# EAGLE board Main-v3.0 (EAGLE 8.3.0)
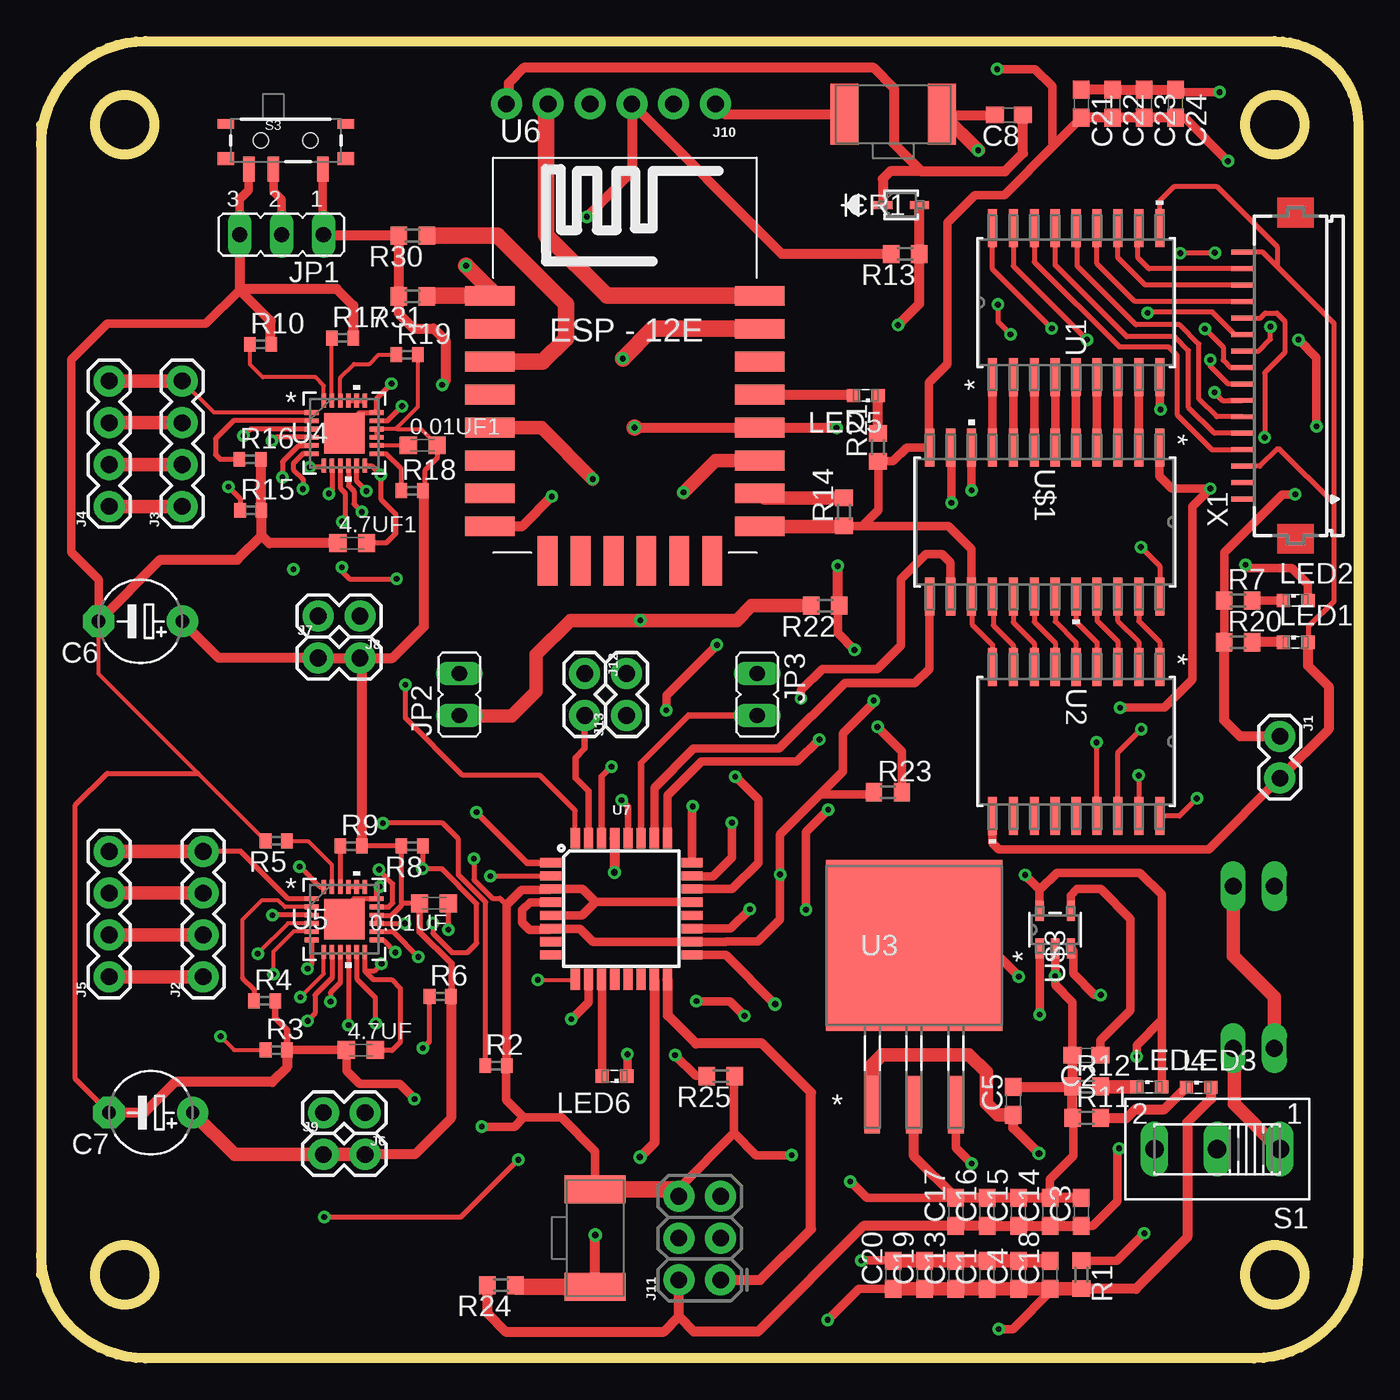
[diagram p0: board, top side]
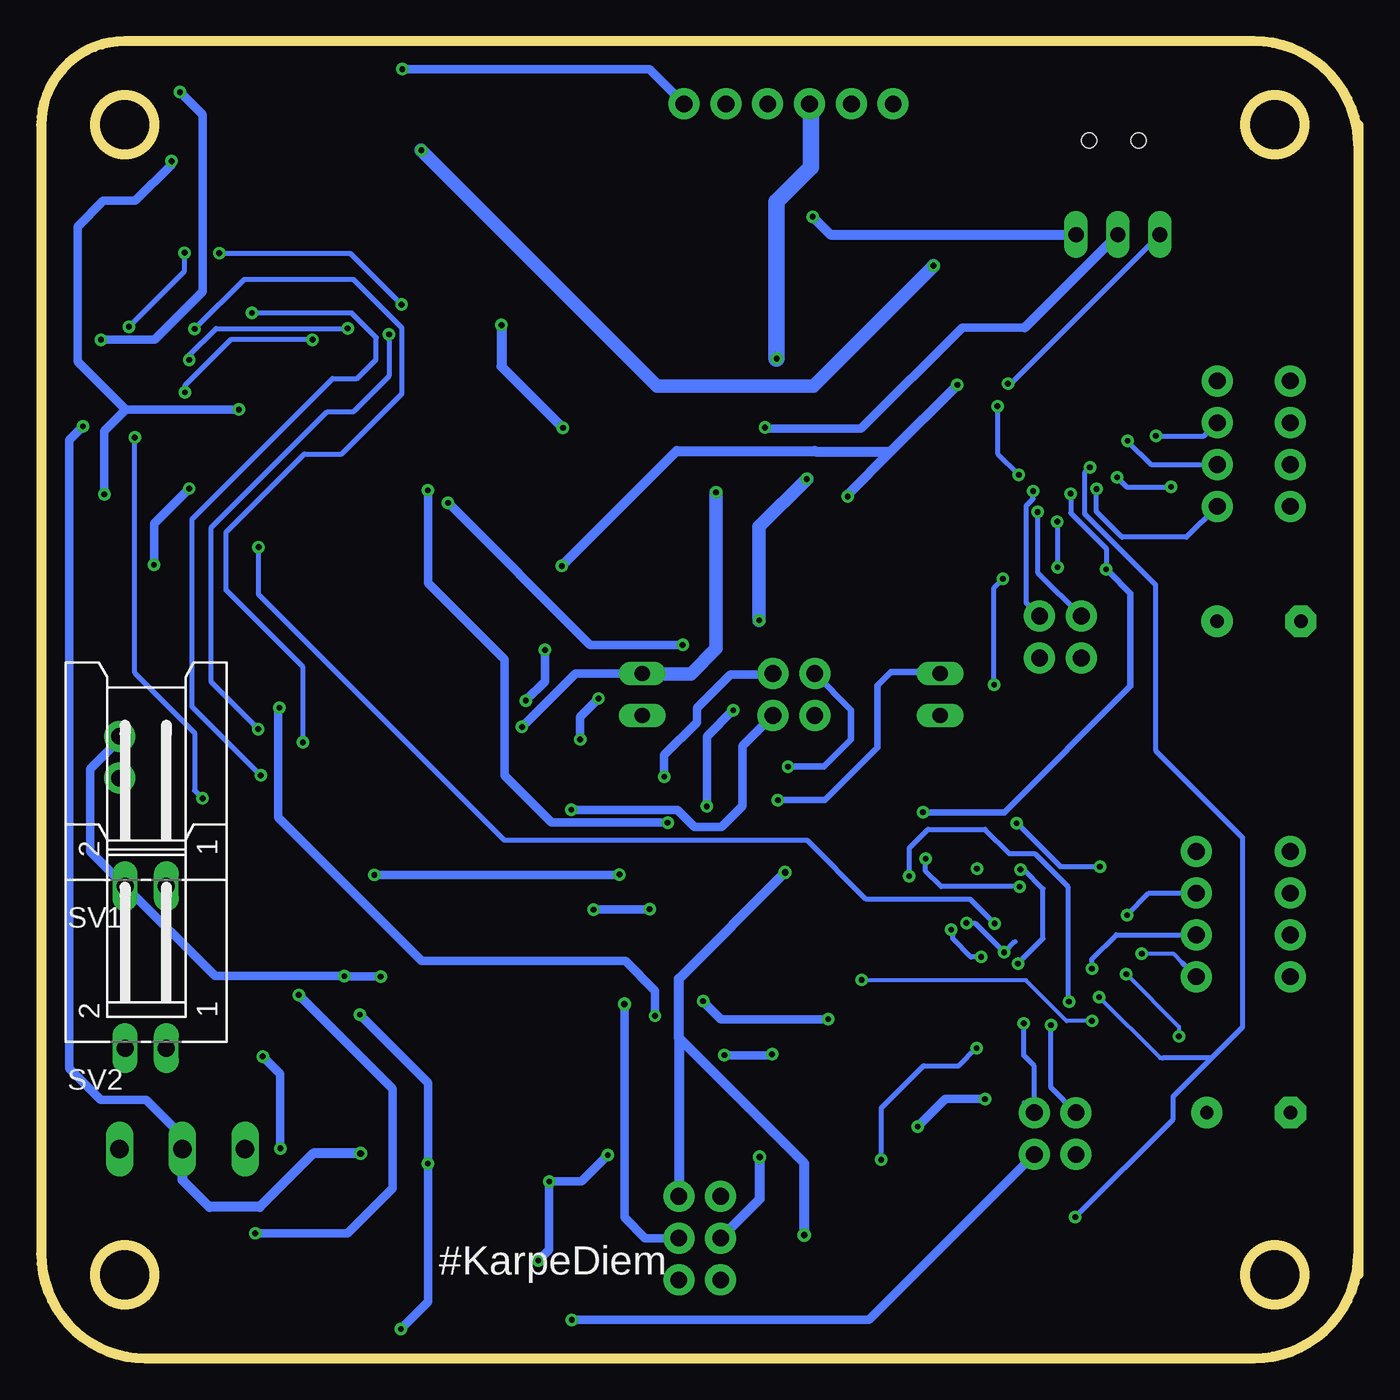
[diagram p1: board, bottom side, seen from below]

Size 80.01 x 80.01 mm. Coordinates in mm from the lower left corner, seen from the top.
Outline: 0,73.66 0,6.35
Outline: 0,6.35 0,5.08
Outline: 0,74.93 0,73.66
Outline: 0,73.66 arc-90 6.35,80.01 74.93,80.01 arc-90 80.01,74.93 80.01,6.35 arc-90 73.66,0 6.35,0 arc-90 0,6.35
Outline: circle at 74.93,74.93 radius 1.8
Outline: circle at 5.08,74.93 radius 1.8
Outline: circle at 5.08,5.08 radius 1.8
Outline: circle at 74.93,5.08 radius 1.8
Copper layers (1*16): Top 0.035mm / dielectric 1.5mm / Bottom 0.035mm
Design rules "default": minimum track width 6mil, minimum drill 0.35mm, track to track 6mil, track to pad 6mil, pad to pad 6mil, via to via 6mil, smd to smd 6mil, copper to edge 40mil, drill to drill 6mil, minimum pad ring 10mil, minimum via ring 8mil, stop-mask expansion 4mil, vias tented up to drill 0mil, thermal gap 10mil

## Footprints (pad centres in the part's own frame; a part is rotated, then mirrored left to right if it is on the bottom)
C0603K = smd 1.05 x 1.08: 1 -0.875,0; 2 0.875,0
C0603 = smd 1.1 x 1: 1 -0.85,0; 2 0.85,0
E5-5 = drill 0.813 pad 1.905: + -2.54,0 | drill 0.813 pad 1.905 octagon: - 2.54,0
SOD-323 = smd 1.168 x 0.483: 1 -1.118,0; 2 1.118,0
1X02 = drill 1.016 pad 1.88: 1 0,0; 2 2.54,0
1X04 = drill 1.016 pad 1.88: 1 0,0; 2 2.54,0; 3 5.08,0; 4 7.62,0
1X06_NO_SILK = drill 1.016 pad 1.88: 1 0,0; 2 2.54,0; 3 5.08,0; 4 7.62,0; 5 10.16,0; 6 12.7,0
2X3-NS = drill 1.016 pad 1.88: 1 -2.54,-1.27; 2 -2.54,1.27; 3 0,-1.27; 4 0,1.27; 5 2.54,-1.27; 6 2.54,1.27
JP2 = drill 0.914 long: 1 -2.54,0; 2 0,0; 3 2.54,0
JP1 = drill 0.914 long: 1 0,-1.27; 2 0,1.27
SML0603 = smd 0.8 x 0.8: A 0.75,0; C -0.75,0
R0603 = smd 1 x 1.1: 1 -0.85,0; 2 0.85,0
R0402 = smd 0.7 x 0.9: 1 -0.65,0; 2 0.65,0
255SB = drill 1.118 long: 1 -3.81,0; 2 0,0; 3 3.81,0
KSS = smd 1.7 x 3.7: P$1 -2.95,0; P$2 2.95,0
SWITCH-SPST-SMD-A = smd 0.7 x 1.5: 1 -2.25,-1.75; 2 -0.75,-1.75; 3 2.25,-1.75 | smd 1 x 0.6: GND1 -3.65,1; GND3 3.65,1 | smd 1 x 0.8: GND2 -3.65,-1.1; GND4 3.65,-1.1 | hole 0.9: -1.5,0; 1.5,0
L02P = drill 1.016 long: 1 1.25,-6.25; 2 -1.25,-6.25
DW18 = smd 2.311 x 0.559: 1 -4.521,5.08; 2 -4.521,3.81; 3 -4.521,2.54; 4 -4.521,1.27; 5 -4.521,0; 6 -4.521,-1.27; 7 -4.521,-2.54; 8 -4.521,-3.81; 9 -4.521,-5.08; 10 4.521,-5.08; 11 4.521,-3.81; 12 4.521,-2.54; 13 4.521,-1.27; 14 4.521,0; 15 4.521,1.27; 16 4.521,2.54; 17 4.521,3.81; 18 4.521,5.08
KTT3_6P22X6P6 = smd 0.965 x 3.505: 1 -2.54,-9.677; 2 0,-9.677; 3 2.54,-9.677 | smd 10.719 x 10.363: 4 0,0
RGE24_2P45X2P45 = smd 0.85 x 0.28: 1 -1.975,1.25; 2 -1.975,0.75; 3 -1.975,0.25; 4 -1.975,-0.25; 5 -1.975,-0.75; 6 -1.975,-1.25; 13 1.975,-1.25; 14 1.975,-0.75; 15 1.975,-0.25; 16 1.975,0.25; 17 1.975,0.75; 18 1.975,1.25 | smd 0.28 x 0.85: 7 -1.25,-1.975; 8 -0.75,-1.975; 9 -0.25,-1.975; 10 0.25,-1.975; 11 0.75,-1.975; 12 1.25,-1.975; 19 1.25,1.975; 20 0.75,1.975; 21 0.25,1.975; 22 -0.25,1.975; 23 -0.75,1.975; 24 -1.25,1.975 | smd 2.45 x 2.45: 25 0,0
ESP12E-SMD = smd 3 x 1.2: ADC -8.3,3.8; CH_PD -8.3,1.8; GND 8.1,-8.2; GPIO0 8.1,-2.2; GPIO2 8.1,-4.2; GPIO4 8.1,-0.2; GPIO5 8.1,1.8; GPIO12 -8.3,-4.2; GPIO13 -8.3,-6.2; GPIO14 -8.3,-2.2; GPIO15 8.1,-6.2; GPIO16 -8.3,-0.2; RESET -8.3,5.8; RXD0 8.1,3.8; TXD0 8.1,5.8; VCC -8.3,-8.2 | smd 1.2 x 3: CS0 -4.8,-10.3; GPIO9 -0.8,-10.3; GPIO10 1.2,-10.3; MISO -2.8,-10.3; MOSI 3.2,-10.3; SCLK 5.2,-10.3
TQFP32-08 = smd 1.27 x 0.559: 1 -4.293,2.8; 2 -4.293,2; 3 -4.293,1.2; 4 -4.293,0.4; 5 -4.293,-0.4; 6 -4.293,-1.2; 7 -4.293,-2; 8 -4.293,-2.8; 17 4.293,-2.8; 18 4.293,-2; 19 4.293,-1.2; 20 4.293,-0.4; 21 4.293,0.4; 22 4.293,1.2; 23 4.293,2; 24 4.293,2.8 | smd 0.559 x 1.27: 9 -2.8,-4.293; 10 -2,-4.293; 11 -1.2,-4.293; 12 -0.4,-4.293; 13 0.4,-4.293; 14 1.2,-4.293; 15 2,-4.293; 16 2.8,-4.293; 25 2.8,4.293; 26 2,4.293; 27 1.2,4.293; 28 0.4,4.293; 29 -0.4,4.293; 30 -1.2,4.293; 31 -2,4.293; 32 -2.8,4.293
DW24 = smd 2.311 x 0.559: 1 -4.521,6.985; 2 -4.521,5.715; 3 -4.521,4.445; 4 -4.521,3.175; 5 -4.521,1.905; 6 -4.521,0.635; 7 -4.521,-0.635; 8 -4.521,-1.905; 9 -4.521,-3.175; 10 -4.521,-4.445; 11 -4.521,-5.715; 12 -4.521,-6.985; 13 4.521,-6.985; 14 4.521,-5.715; 15 4.521,-4.445; 16 4.521,-3.175; 17 4.521,-1.905; 18 4.521,-0.635; 19 4.521,0.635; 20 4.521,1.905; 21 4.521,3.175; 22 4.521,4.445; 23 4.521,5.715; 24 4.521,6.985
TSOT-23_S5 = smd 1.219 x 0.508: 1 -1.143,0.95; 2 -1.143,0; 3 -1.143,-0.95; 4 1.143,-0.95; 5 1.143,0.95
FH12-16S-1SH = smd 0.3 x 1.3: 1 -7.5,3.25; 2 -6.5,3.25; 3 -5.5,3.25; 4 -4.5,3.25; 5 -3.5,3.25; 6 -2.5,3.25; 7 -1.5,3.25; 8 -0.5,3.25; 9 0.5,3.25; 10 1.5,3.25; 11 2.5,3.25; 12 3.5,3.25; 13 4.5,3.25; 14 5.5,3.25; 15 6.5,3.25; 16 7.5,3.25

## Placement (x,y rotation side)
0.01UF  [C0603K]  23.86,27.64 180 top
0.01UF1  [C0603K]  23.18,55.46 0 top
4.7UF  [C0603K]  19.42,18.73 0 top
4.7UF1  [C0603K]  18.9,49.52 0 top
C1  1uF  [C0603]  57.47,5.08 90 top
C2  0.1uF  [C0603]  63.5,18.41 180 top
C3  1uF  [C0603]  63.18,8.89 90 top
C4  0.1uF  [C0603]  59.37,5.08 90 top
C5  0.33uF  [C0603]  59.05,15.65 90 top
C6  100uF  [E5-5]  6.03,44.77 180 top
C7  100uF  [E5-5]  6.67,14.92 180 top
C8  1uf  [C0603]  58.79,75.53 180 top
C13  0.1uF  [C0603]  55.56,5.08 90 top
C14  0.1uF  [C0603]  61.28,8.89 90 top
C15  0.1uF  [C0603]  59.37,8.89 90 top
C16  0.1uF  [C0603]  57.47,8.89 90 top
C17  0.1uF  [C0603]  55.56,8.89 90 top
C18  0.1uF  [C0603]  61.28,5.08 90 top
C19  0.1uF  [C0603]  53.66,5.08 90 top
C20  0.1uF  [C0603]  51.75,5.08 90 top
C21  0.1uF  [C0603]  63.18,76.2 270 top
C22  0.1uF  [C0603]  65.09,76.2 270 top
C23  0.1uF  [C0603]  66.99,76.2 270 top
C24  0.1uF  [C0603]  68.9,76.2 270 top
CR1  BAT20JFILM  [SOD-323]  52.24,70.05 0 top
J1  [1X02]  75.25,37.78 270 top
J2  [1X04]  9.84,23.18 90 top
J3  [1X04]  8.57,51.75 90 top
J4  [1X04]  4.13,51.75 90 top
J5  [1X04]  4.13,23.18 90 top
J6  [1X02]  19.68,14.92 180 top
J7  [1X02]  16.83,42.55 0 top
J8  [1X02]  19.37,45.09 180 top
J9  [1X02]  17.14,12.38 0 top
J10  [1X06_NO_SILK]  40.96,76.2 180 top
J11  AVR_SPI_PROG_3X2NS  [2X3-NS]  40.01,7.3 90 top
J12  [1X02]  33.02,41.59 270 top
J13  [1X02]  35.56,39.05 90 top
JP1  [JP2]  14.61,68.26 180 top
JP2  [JP1]  25.4,40.32 0 top
JP3  [JP1]  43.5,40.32 180 top
LED1  [SML0603]  76.2,43.5 0 top
LED2  [SML0603]  76.2,46.04 0 top
LED3  [SML0603]  70.31,16.46 0 top
LED4  [SML0603]  67.31,16.48 0 top
LED5  [SML0603]  50.09,58.48 180 top
LED6  [SML0603]  34.82,17.14 180 top
R1  100K  [R0603]  63.18,5.08 270 top
R2  47k  [R0402]  27.62,17.78 0 top
R3  0.1R  [R0402]  14.29,18.73 0 top
R4  0.1R  [R0402]  13.58,21.72 0 top
R5  47k  [R0402]  14.29,31.43 180 top
R6  10k  [R0402]  24.24,21.98 0 top
R7  330R  [R0603]  72.71,46.04 0 top
R8  1.5k  [R0402]  22.54,31.11 180 top
R9  10k  [R0402]  18.83,31.11 0 top
R10  47k  [R0402]  13.34,61.59 0 top
R11  330R  [R0603]  63.5,14.61 0 top
R12  150R  [R0603]  63.5,16.51 0 top
R13  10k  [R0603]  52.48,67.08 180 top
R14  10k  [R0603]  48.77,51.41 90 top
R15  0.1R  [R0402]  12.74,51.51 0 top
R16  0.1R  [R0402]  12.7,54.61 0 top
R17  47k  [R0402]  18.3,61.98 0 top
R18  1.5k  [R0402]  22.54,52.7 0 top
R19  10k  [R0402]  22.23,60.96 0 top
R20  150R  [R0603]  72.71,43.5 0 top
R21  100R  [R0603]  50.83,55.35 90 top
R22  2.2k  [R0603]  47.62,45.72 180 top
R23  2.2k  [R0603]  51.44,34.39 0 top
R24  10k  [R0603]  27.94,4.45 180 top
R25  100R  [R0603]  41.27,17.14 180 top
R30  10k  [R0603]  22.57,68.2 180 top
R31  10k  [R0603]  22.57,64.5 180 top
S1  [255SB]  71.44,12.7 180 top
S2  KSS  [KSS]  51.75,75.56 0 top
S3  [SWITCH-SPST-SMD-A]  14.86,73.98 0 top
S4  KSS  [KSS]  33.66,7.3 270 top
SV1  [L02P]  73.66,34.92 0 bottom
SV2  [L02P]  73.66,25.08 0 bottom
U1  ULN2803ADWG4  [DW18]  62.87,64.14 90 top
U2  ULN2803ADWG4  [DW18]  62.87,37.47 270 top
U3  UA7805CKTTR  [KTT3_6P22X6P6]  53.02,25.08 0 top
U4  DRV8834RGER  [RGE24_2P45X2P45]  18.41,56.2 0 top
U5  DRV8834RGER  [RGE24_2P45X2P45]  18.41,26.67 0 top
U6  [ESP12E-SMD]  35.56,58.74 0 top
U7  ATMEGA328P_TQFP  [TQFP32-08]  35.24,27.3 0 top
U$1  CD4067BM96  [DW24]  60.96,50.8 270 top
U$3  LTC1844ES5-3.3  [TSOT-23_S5]  61.59,26.04 90 top
X1  FH12-16S-1SH  [FH12-16S-1SH]  76.2,59.69 90 top

## Library data of the parts
0.01UF 0.01UF1 4.7UF 4.7UF1 C1-C8 C13-C24 R1-R25 R30 R31 = resistor
CR1 = Beeclust; MANUFACTURER_PART_NUMBER: BAT20JFILM; VENDOR: ST Microelectronics
J1 J6-J13 = SparkFun-Connectors
J2-J5 = SparkFun-Connectors; PROD_ID: CONN-09696
JP1-JP3 = jumper
LED1-LED6 = led
S1 = switch
S2 S4 = adjacent-reality
S3 = SparkFun-Electromechanical; PROD_ID: SWCH-10651
SV1 SV2 = con-amp-mt; OC_FARNELL: unknown; OC_NEWARK: unknown
U1 U2 = Beeclust; MANUFACTURER_PART_NUMBER: ULN2803ADWG4; VENDOR: Texas Instruments
U3 = Beeclust; MANUFACTURER_PART_NUMBER: UA7805CKTTR; VENDOR: Texas Instruments
U4 U5 = Beeclust; MANUFACTURER_PART_NUMBER: DRV8834RGER; VENDOR: Texas Instruments
U6 = esp8266modules
U7 = SparkFun-IC-Microcontroller; PROD_ID: IC-09069
U$1 = Beeclust; MANUFACTURER_PART_NUMBER: CD4067B_DW_24; VENDOR: Texas Instruments
U$3 = Beeclust
X1 = con-hirose; OC_FARNELL: unknown; OC_NEWARK: unknown

## Nets
+3V3: C3.1 C14.1 C15.1 C16.1 C17.1 J10.3 J11.2 JP1.1 LED4.A R13.2 R22.1 R23.1 R24.2 R30.2 R31.2 S3.3 U6.VCC U7.4 U7.6 U7.18 U$3.5
+5V: 0.01UF1.2 0.01UF.2 C1.1 C4.1 C6.+ C7.+ C13.1 C18.1 C19.1 C20.1 J7.1 J7.2 J9.1 J9.2 LED3.A R1.2 R6.2 R8.2 R9.2 R18.2 R19.2 U3.3 U4.15 U4.16 U5.15 U5.16 U$1.24 U$3.1
+24V: J1.2 LED1.A U1.10 U2.10 X1.3 X1.16
A0: U7.23 U$1.10
A1: U7.24 U$1.11
A2: U7.25 U$1.14
A3: U7.26 U$1.13
DIR1: U4.9 U7.32
DIR2: U5.9 U7.2
DTR: C8.1 CR1.1 J10.6
ENB: R6.1 U4.7 U5.7
ESPRST: C8.2 R31.1 S2.P$2 U6.RESET
ESPRX: J10.4 U6.RXD0
ESPTX: J10.5 U6.TXD0
GND: 4.7UF1.1 4.7UF.1 C1.2 C2.2 C3.2 C4.2 C5.2 C6.- C7.- C13.2 C14.2 C15.2 C16.2 C17.2 C18.2 C19.2 C20.2 C21.2 C22.2 C23.2 C24.2 J1.1 J10.1 J11.6 JP1.3 R2.2 R3.2 R4.2 R5.2 R7.1 R10.2 R11.1 R12.1 R14.1 R15.2 R16.2 R17.2 R20.1 R21.1 R25.1 S2.P$1 S3.1 S4.P$1 SV1.2 U1.9 U2.9 U3.2 U3.4 U4.18 U4.25 U5.18 U5.25 U6.GND U7.3 U7.5 U7.21 U$1.12 U$1.15 U$3.2
GPIO0: CR1.2 JP1.2 R13.1 S3.2 U6.GPIO0
MISO: J11.1 U7.16
MOSI: J11.4 U7.15
N$1: SV1.1 SV2.2
N$2: U5.19 U5.20 U5.21
N$3: U1.8 U$1.2
N$4: U1.7 U$1.3
N$5: U1.6 U$1.4
N$6: U1.5 U$1.5
N$7: U1.4 U$1.6
N$8: U1.3 U$1.7
N$9: U1.2 U$1.8
N$10: U1.1 U$1.9
N$11: U2.1 U$1.23
N$12: U2.2 U$1.22
N$13: U2.3 U$1.21
N$14: U2.4 U$1.20
N$15: U2.5 U$1.19
N$16: U2.6 U$1.18
N$17: J3.1 J4.1 U4.6
N$18: J3.2 J4.2 U4.4
N$19: J3.3 J4.3 U4.3
N$20: J3.4 J4.4 U4.1
N$21: U1.11 X1.15
N$22: U1.12 X1.14
N$23: U1.13 X1.13
N$24: U1.14 X1.6
N$25: U1.15 X1.5
N$26: U1.16 X1.4
N$27: U1.17 X1.7
N$28: U1.18 X1.8
N$29: U2.8 U$1.16
N$30: U2.18 X1.12
N$31: U2.17 X1.11
N$32: U2.16 X1.10
N$33: U2.15 X1.9
N$34: U2.7 U$1.17
N$35: J2.1 J5.1 U5.4
N$36: J2.2 J5.2 U5.6
N$37: S1.1 SV2.1
N$38: C2.1 U$3.4
N$39: R1.1 U$3.3
N$40: J2.3 J5.3 U5.3
N$41: J2.4 J5.4 U5.1
N$42: 0.01UF.1 U5.14
N$43: R5.1 U5.23
N$44: R2.1 U5.24
N$45: LED2.C R7.2
N$46: R3.1 U5.5
N$47: R4.1 U5.2
N$48: R9.1 U5.22
N$49: R8.1 U5.13
N$50: LED3.C R11.2
N$51: LED4.C R12.2
N$52: R30.1 U6.CH_PD
N$53: U4.19 U4.20 U4.21
N$54: R17.1 U4.23
N$55: LED6.C R25.2
N$56: LED5.C R21.2
N$57: LED6.A U7.11
N$65: R10.1 U4.24
N$66: R15.1 U4.5
N$67: R16.1 U4.2
N$68: 0.01UF1.1 U4.14
N$73: R19.1 U4.22
N$74: R18.1 U4.13
N$75: J6.2 U5.10
N$76: J6.1 U5.11
N$77: J8.2 U4.10
N$78: J8.1 U4.11
N$79: LED1.C R20.2
N$80: LED5.A U6.GPIO4
N$82: J13.1 U7.19
N$84: R14.2 U6.GPIO15
N$85: J13.2 U7.22
N$86: J12.1 U7.30
N$87: J12.2 U7.31
N$91: U6.GPIO5
PULSE: LED2.A U7.10 U$1.1
RGB-1: U7.12
RGB-2: U7.13
RGB-3: U7.14
RST: J11.5 R24.1 S4.P$2 U7.29
SCK: J11.3 U7.17
SCL: JP2.2 U7.28
SCLESP: JP2.1 R22.2 U6.GPIO14
SDA: JP3.2 U7.27
SDAESP: JP3.1 R23.2 U6.GPIO2
STEP1: U4.8 U7.1
STEP2: U5.8 U7.9
VCC: C5.1 C21.1 C22.1 C23.1 C24.1 S1.2 U3.1
VINT1: 4.7UF1.2 U4.12 U4.17
VINT2: 4.7UF.2 U5.12 U5.17

## Tracks (layer width: path | path; a pad name or v marks a point on that pad's centre or on a via)
+3V3  (via drill 0.35)
  Top 0.508: U$3.5 60.65,28.44 | 60.65,28.44 61.7,29.49 66.75,29.49 68.07,28.17 68.07,20.55 | 68.07,20.55 68.07,16.5 LED4.A | C3.1 63.87,8.04 65.38,9.55 65.38,12.65 v65.48,12.75 | v66.55,18.34 66.55,19.02 68.07,20.55 | 47.3,34.24 50.43,34.24 R23.1 | S3.3 17.11,68.3 JP1.1 | 60.65,28.44 60.65,28.48 v59.77,29.36 | 47.3,34.24 48.69,35.64 48.69,37.95 50.57,39.83 v50.57,39.95 | v49.4,43.03 48.39,44.04 48.39,45.81 | 47.3,34.24 44.88,31.83 v44.88,29.39 44.88,26.67 43.54,25.32 41.63,25.32 41.61,25.3 U7.18 33.52,25.3 32.74,26.09 30.97,26.09 U7.6 30.88,26.04 29.67,26.04 29.21,26.49 29.21,27.23 29.69,27.7 U7.4
  Top 0.61: C3.1 C14.1 C15.1 C16.1 C17.1 49.95,8.04 43.54,1.63 39.65,1.63 38.73,2.54 | 38.73,2.54 J11.2 | R24.2 27.09,2.75 28.22,1.63 37.82,1.63 38.73,2.54 | R13.2 45,67.08 J10.3 35.88,72.07 v33.15,69.34 | JP1.1 17.21,68.2 R30.2 R31.2 21.72,63.47 22.63,62.56 23.82,62.56 24.56,61.82 24.56,59.33 v24.36,59.13 | v31.01,52.35 29.2,50.54 U6.VCC | R22.1 48.39,45.81 v48.39,48.13
  Bottom 0.508: v65.48,12.75 65.48,17.27 v66.55,18.34 | v50.57,39.95 49.4,41.12 v49.4,43.03 | v44.88,29.39 44.91,29.36 v59.77,29.36
  Bottom 0.61: v33.15,69.34 32.07,68.26 JP1.1 | 28.41,55.08 v24.36,59.13 | 28.41,55.08 31.01,52.48 v31.01,52.35 | v48.39,48.13 41.4,55.12 33.02,55.12 32.98,55.08 28.41,55.08
+5V  (via drill 0.35)
  Top 0.254: 0.01UF1.2 23.07,56.45 21.59,56.45 | 21.59,56.45 U4.16 U4.15 | R19.2 22.86,60.95 22.86,57.78 21.59,56.52 21.59,56.45
  Top 0.305: R9.2 R8.2 21.89,27.69 | 21.89,27.69 21.89,27.51 21.26,26.87 20.44,26.87 U5.16 U5.15 v22.1,26.42 | 0.01UF1.2 24.05,54.69 23.29,53.92 23.29,52.71 23.24,52.66 | 0.01UF.2 21.94,27.64 21.89,27.69 | v66.8,49.28 67.94,48.13 U$1.24
  Top 0.406: 0.01UF.2 22.99,25.91 24.92,23.98 24.92,22.01 R6.2
  Top 0.508: U3.3 55.56,12.79 v56.52,11.84 | v58.17,1.78 59.02,1.78 61.47,4.23 | v60.66,20.88 60.66,24.88 U$3.1 | C20.1 49.67,4.23 v47.78,2.34
  Top 0.61: LED3.A 71.06,15.76 69.62,14.33 69.62,7.34 66.5,4.22 63.2,4.22 R1.2 | J7.2 J7.1 10.79,42.55 C6.+ | R6.2 24.89,14.58 22.71,12.39 19.34,12.39 19.33,12.38 | R9.2 19.48,42.43 J7.2 | J7.2 21.36,42.55 23.24,44.42 23.24,52.66 R18.2
  Top 0.813: C20.1 C19.1 C13.1 C1.1 C4.1 C18.1 61.47,4.23 R1.2 | J9.2 19.33,12.38 J9.1 11.75,12.38 C7.+
  Bottom 0.305: v22.1,26.42 23.57,27.89 29.9,27.89 33.48,31.47 51.87,31.47 66.8,46.41 v66.8,49.28
  Bottom 0.508: v58.17,1.78 56.52,3.43 v56.52,11.84 56.52,16.74 v60.66,20.88 | v47.78,2.34 29.73,2.34 J9.2
+24V
  Top 0.305: X1.3 74.03,54.19 75.08,55.24 75.21,55.24 78.54,51.92 | X1.16 74.21,67.19 75.08,66.32 | 75.08,66.32 75.08,67.51 71.4,71.2 68.83,71.2 67.94,70.31 U1.10 | 76.95,43.2 77.01,43.27 77.01,44.48 78.54,46 78.54,51.92 | 78.54,51.92 78.54,62.87 75.08,66.32
  Top 0.508: J1.2 70.92,30.91 58.17,30.91 57.78,31.29 U2.10
  Top 0.61: LED1.A 76.95,43.2 76.95,42.07 78.21,40.82 78.21,38.2 J1.2
A0  (via drill 0.35)
  Top 0.508: U7.23 39.55,29.29 40.82,29.29 41.96,30.43 v41.96,32.54 | v56.52,52.73 U$1.10
  Bottom 0.508: v56.52,52.73 56.52,47.09 51.87,42.44 51.87,35.41 49,32.54 v41.96,32.54
A1  (via drill 0.35)
  Top 0.508: U$1.11 55.3,55.27 v55.3,51.97 | v41.05,43.33 37.97,40.26 v37.97,39.37 | v39.57,33.53 39.53,33.49 U7.24
  Bottom 0.508: v55.3,51.97 46.66,43.33 v41.05,43.33 | v37.97,39.37 39.57,37.77 v39.57,33.53
A2  (via drill 0.35)
  Top 0.508: U7.25 38.04,34.18 40.11,36.25 45.92,36.25 v47.27,37.59 | v46.15,40.08 46.15,40.59 47.45,41.88 50.8,41.88 52.22,43.31 52.22,47.35 53.75,48.87 54.71,48.87 55.24,48.34 U$1.14
  Bottom 0.508: v47.27,37.59 47.27,38.96 v46.15,40.08
A3
  Top 0.508: U7.26 37.24,34.65 39.62,37.03 44.83,37.03 48.82,41.02 53.09,41.02 53.95,41.88 53.95,46.25 U$1.13
DIR1  (via drill 0.35)
  Top 0.305: U7.32 32.44,33.27 30.3,35.41 25.6,35.41 22.12,38.89 v22.12,40.92 | U4.9 18.16,52.87 18.46,52.57 18.46,51 v18.29,50.83 | v18.26,48.06 18.26,47.83 18.75,47.35 v21.59,47.35
  Bottom 0.305: v22.12,40.92 22.12,46.81 v21.59,47.35 | v18.29,50.83 18.29,48.08 v18.26,48.06
DIR2  (via drill 0.35)
  Top 0.305: U5.9 18.16,22.81 17.58,22.23 v17.58,21.67 | v27.28,29.29 27.3,29.3 U7.2
  Bottom 0.305: v17.58,21.67 17.65,21.74 17.65,28.65 19.66,30.66 21.21,30.66 22.68,32.13 26.14,32.13 27.28,30.99 v27.28,29.29
DTR
  Top 0.61: C8.1 59.64,73.2 58.55,72.11 53.47,72.11 | 53.47,72.11 51.59,72.11 51.13,71.65 51.13,70.07 CR1.1 | 53.47,72.11 51.79,73.79 51.79,77.17 50.57,78.38 29.31,78.38 28.4,77.47 28.4,76.34 J10.6
ENB  (via drill 0.35)
  Top 0.254: v15.75,21.95 17.16,23.36 U5.7
  Top 0.305: U4.7 17.07,54.13 v16.31,54.13 | v17.2,8.59 25.5,8.59 v28.98,12.06 | v23.19,18.85 23.59,19.25 R6.1
  Bottom 0.254: 11.89,18.24 12.04,18.24 v15.75,21.95
  Bottom 0.305: v16.31,54.13 16.64,53.8 16.64,51.31 12.32,46.99 12.32,36.93 7.04,31.65 7.04,20.12 8.91,18.24 | 8.91,18.24 11.89,18.24 | v28.98,12.06 28.98,15.21 26.42,17.78 24.26,17.78 v23.19,18.85 | 8.91,18.24 11.25,15.9 11.25,14.53 v17.2,8.59
ESPRST  (via drill 0.35)
  Top 0.61: C8.2 54.74,75.53 S2.P$2
  Top 0.813: v56.92,73.38 54.77,75.53 54.74,75.53
  Top 1.016: R31.1 23.45,64.54 U6.RESET 27.26,64.92 v25.81,66.37
  Bottom 0.813: v25.81,66.37 25.81,66.34 33.1,59.05 42.6,59.05 v56.92,73.38
ESPRX  (via drill 0.35)
  Top 1.016: U6.RXD0 37.14,62.54 v35.33,60.73
  Bottom 1.016: v35.33,60.73 35.33,70.26 33.25,72.34 33.25,76.11 J10.4
ESPTX
  Top 1.016: U6.TXD0 34.37,64.54 30.68,68.22 30.68,76.09 J10.5
GND  (via drill 0.35)
  Top 0.254: R5.2 9.53,35.54 3.49,41.58 C6.-
  Top 0.305: U$1.15 56.54,46.25 56.54,44.58 57.78,43.33 U2.9 | U4.25 18.41,56.54 19.3,57.43 20.37,57.43 U4.18 20.39,58.31 v21.29,59.21 | U5.25 18.87,27.13 18.87,27.79 19,27.91 19.93,27.91 19.94,27.92 U5.18 20.39,28.47 v20.57,28.65 | C7.- 2.08,16.97 2.08,33.6 4.02,35.54 9.53,35.54 | v26.29,30.35 26.29,29.07 27.41,27.95 27.86,27.95 28.27,27.54
  Top 0.406: R4.2 14.23,20.67 14.94,19.96 R3.2
  Top 0.508: 29.31,14.63 28.25,15.7 28.25,17.75 R2.2 28.27,27.54 29.18,28.45 30.89,28.45 U7.3 32.89,28.5 33.67,27.72 | 29.31,14.63 31.6,14.63 33.66,12.57 S4.P$1 | J11.6 38.73,10.34 42.09,13.69 | 42.09,13.69 42.09,17.11 R25.1 | U$3.2 v61.59,23.22 61.59,22.68 62.65,21.63 C2.2 | C14.2 61.28,10.88 62.69,12.29 62.69,14.57 R11.1 | S3.1 12.61,70.95 12.06,70.41 JP1.3 | U7.5 32.85,26.91 33.67,27.72 | 33.67,27.72 39.52,27.72 U7.21 | R3.2 4.7UF.1 18.54,17.45 19.33,16.66 21.77,16.66 v22.68,15.75 | C17.2 50.15,9.74 v49.15,10.74 | v45.59,12.34 43.43,12.34 42.09,13.69 | v26.77,14.07 28.75,14.07 29.31,14.63 | v59.38,23.19 57.49,25.08 U3.4 | R20.1 R7.1 71.86,48.95 75.39,52.48 v76.17,52.48 | C6.- 3.49,47.31 1.83,48.97 1.83,60.66 4.01,62.84 10.01,62.84 12.06,64.9 | U1.9 67.94,57.68 v68,57.63 | v72.08,72.72 69.45,75.35 C24.2 | 61.54,73.71 C21.2 | 61.54,73.71 58.49,70.66 56.72,70.66 55.04,68.99 55.04,60.4 53.92,59.28 53.92,55.37 | U$1.15 56.52,49.15 55.1,50.56 49.89,50.56 | R14.1 49.89,50.56 | 49.89,50.56 50.85,51.52 50.85,54.47 | R21.1 51.75,54.5 52.58,55.32 U$1.12 | v49.81,5.94 51.74,5.94 C20.2 | 61.54,73.71 61.42,73.84 61.42,77.27 60.37,78.31 v58.06,78.31
  Top 0.61: C3.2 C14.2 C15.2 C16.2 C17.2 53.02,12.28 U3.2 | R16.2 13.35,51.55 R15.2 13.39,49.99 | R10.2 13.95,61.63 13.95,63.02 12.06,64.9 | JP1.3 12.06,64.9 | J10.1 41.59,75.56 S2.P$1 | C24.2 C23.2 C22.2 C21.2 | U$1.12 53.92,55.37 | R3.2 14.94,17.68 14.05,16.79 8.15,16.79 6.27,14.91 C7.- | R20.1 71.86,38.76 72.82,37.8 75.23,37.8 J1.1 | C2.2 R12.1 | R11.1 R12.1 | C5.2 62.64,16.5 R12.1 | R17.2 18.95,63.95 17.96,64.95 12.12,64.95 12.06,64.9 | C6.- 7.24,48.51 11.91,48.51 13.39,49.99 | 4.7UF1.1 13.86,49.52 13.39,49.99
  Top 0.813: C18.2 C4.2 C1.2 C13.2 C19.2 C20.2 | U6.GND 48.75,50.54 R14.1 | 50.85,54.47 R21.1
  Top 1.016: S4.P$1 38.33,10.25 J11.6
  Bottom 0.305: v21.29,59.21 21.12,59.21 JP1.3 | v20.57,28.65 25.35,28.65 26.29,29.59 v26.29,30.35
  Bottom 0.508: v58.06,78.31 43.07,78.31 J10.1 | v45.59,12.34 47.19,10.74 v49.15,10.74 49.15,6.6 v49.81,5.94 | v22.68,15.75 25.09,15.75 v26.77,14.07 | v59.38,23.19 61.57,23.19 v61.59,23.22 69.45,23.22 SV1.2 77.04,30.8 77.04,35.81 75.25,37.6 J1.1 | v68,57.63 74.88,57.63 | 72.19,72.72 v72.08,72.72 72.08,72.52 74.3,70.31 76.22,70.31 77.8,68.73 77.8,60.55 74.88,57.63 | 74.88,57.63 76.17,56.34 v76.17,52.48
GPIO0  (via drill 0.35)
  Top 0.508: S3.2 14.11,70.88 14.61,70.38 JP1.2
  Top 0.61: CR1.2 53.33,70.03 R13.1 53.33,64.05 v52.05,62.76 | v48.31,56.52 43.68,56.52 U6.GPIO0 v36.04,56.54
  Top 1.016: v36.05,56.54 v36.04,56.54
  Bottom 0.508: 20.26,62.61 24.05,62.61 30.2,56.46 35.97,56.46 v36.04,56.54
  Bottom 0.61: v52.05,62.76 52.05,60.25 v48.31,56.52 | JP1.2 20.26,62.61
MISO
  Top 0.61: J11.1 43.67,4.76 46.76,7.85 46.76,16.15 43.79,19.13 39.78,19.13 38.08,20.83 38.08,22.98 U7.16
MOSI  (via drill 0.4)
  Top 0.61: U7.15 37.24,13.09 v36.37,12.22
  Bottom 0.61: v36.37,12.22 36.37,9.66 J11.4
N$1
  Top 0.813: SV2.2 74.91,21.97 72.42,24.46 SV1.1
N$2
  Top 0.305: U5.19 U5.20 U5.21
N$3
  Top 0.508: U1.8 U$1.2
N$4
  Top 0.508: U1.7 U$1.3
N$5
  Top 0.508: U1.6 U$1.4
N$6
  Top 0.508: U1.5 U$1.5
N$7
  Top 0.508: U1.4 U$1.6
N$8
  Top 0.508: U1.3 U$1.7
N$9
  Top 0.508: U1.2 U$1.8
N$10
  Top 0.508: U1.1 U$1.9
N$11
  Top 0.305: U$1.23 66.67,44.78 67.94,43.51 U2.1
N$12
  Top 0.305: U$1.22 65.38,46.25 65.38,44.83 66.67,43.54 U2.2
N$13
  Top 0.305: U$1.21 64.14,44.81 65.41,43.54 U2.3
N$14
  Top 0.305: U$1.20 62.87,44.76 64.14,43.48 U2.4
N$15
  Top 0.305: U$1.19 61.59,44.76 62.87,43.48 U2.5
N$16
  Top 0.305: U$1.18 60.33,44.73 61.59,43.46 U2.6
N$17  (via drill 0.35)
  Top 0.305: U4.6 15.91,54.95 15.32,54.36 15.32,54 15.9,53.42 v15.9,52.81
  Top 0.813: J3.1 J4.1
  Bottom 0.305: J3.1 10.44,49.89 14.35,49.89 15.9,51.44 v15.9,52.81
N$18  (via drill 0.35)
  Top 0.305: U4.4 14.24,55.95 v14.02,55.73
  Top 0.813: J4.2 J3.2
  Bottom 0.305: v14.02,55.73 12.59,54.29 J3.2
N$19  (via drill 0.35)
  Top 0.305: U4.3 12.71,56.45 v12.29,56.03
  Top 0.813: J3.3 J4.3
  Bottom 0.305: v12.29,56.03 9.37,56.03 J3.3
N$20
  Top 0.254: U4.1 10.5,57.45 J3.4
  Top 0.813: J3.4 J4.4
N$21
  Top 0.305: X1.15 67.29,66.19 66.62,66.85 66.62,68.61 U1.11
N$22
  Top 0.305: X1.14 67.07,65.19 65.41,66.85 U1.12
N$23
  Top 0.305: X1.13 66.44,64.19 64.14,66.5 U1.13
N$24
  Top 0.305: U1.14 62.94,68.58 62.94,66.34 66.5,62.79 69.16,62.79 70.33,61.62 70.33,58.27 71.41,57.19 X1.6
N$25
  Top 0.305: X1.5 71.27,56.19 69.7,57.76 69.7,61.21 68.86,62.05 65.94,62.05 61.59,66.4 U1.15
N$26
  Top 0.305: U1.16 60.33,66.6 65.48,61.44 68.48,61.44 68.99,60.94 68.99,57.33 71.12,55.19 X1.4
N$27  (via drill 0.35)
  Top 0.305: U1.17 59.05,66.34 v63.52,61.87 | 72.82,58.19 72.19,58.19 | 72.82,58.19 X1.7 | v71.27,58.67 71.76,58.19 72.82,58.19
  Bottom 0.305: v63.52,61.87 68.5,61.87 71.27,59.11 v71.27,58.67
N$28  (via drill 0.35)
  Top 0.305: X1.8 72.11,59.18 71.02,60.27 v71.02,60.66 | v61.39,62.56 57.78,66.17 U1.18
  Bottom 0.305: v61.39,62.56 69.39,62.56 71.02,60.94 v71.02,60.66
N$29
  Top 0.305: U$1.16 57.84,46.23 57.84,44.53 59.05,43.31 U2.8
N$30  (via drill 0.35)
  Top 0.305: 74.45,56.06 v74.32,55.93 74.32,59.87 75.54,61.09 75.54,63.02 75.06,63.5 74.37,63.5 74.06,63.19 X1.12 | v70.21,34.01 69.14,32.94 U2.18
  Bottom 0.305: v74.32,55.93 74.32,41.63 70.69,38 70.69,34.49 v70.21,34.01
N$31  (via drill 0.35)
  Top 0.305: X1.11 72.51,62.19 71.14,63.55 67.25,63.55 v67.21,63.51 | v66.67,35.41 U2.17
  Bottom 0.305: v67.21,63.51 61.17,63.51 59.66,62 | 59.66,62 59.64,61.98 | v66.67,35.41 70.84,39.57 70.84,50.98 62.31,59.51 60.81,59.51 59.66,60.66 59.66,62
N$32  (via drill 0.35)
  Top 0.305: U2.16 65.41,36.8 v66.83,38.23 | X1.10 73.97,61.19 74.68,61.9 v74.68,62.66 | v71.3,67.16 71.27,67.13 v69.19,67.13 | v58.12,64.01 58.12,62.97 v58.88,62.2
  Bottom 0.305: v66.83,38.23 69.67,41.07 69.67,50.47 62.64,57.51 61.04,57.51 58.88,59.66 v58.88,62.2 | v74.68,62.66 71.3,66.04 v71.3,67.16 | v69.19,67.13 61.24,67.13 v58.12,64.01
N$33  (via drill 0.35)
  Top 0.305: U2.15 64.14,37.39 v64.11,37.41 | v70.69,62.53 71.81,61.42 71.81,60.63 72.25,60.19 X1.9
  Bottom 0.305: v64.11,37.41 64.11,41.99 68.78,46.66 68.78,50.19 64.03,54.94 61.75,54.94 58.09,58.6 58.09,62.59 61.04,65.53 67.69,65.53 v70.69,62.53
N$34
  Top 0.305: U$1.17 59.05,44.7 60.33,43.43 U2.7
N$35  (via drill 0.35)
  Top 0.254: U5.4 14.99,26.42 v13.16,24.59
  Top 0.813: J5.1 J2.1
  Bottom 0.254: v13.16,24.59 11.25,24.59 10.69,24.03
  Bottom 0.305: 10.69,24.03 J2.1
N$36  (via drill 0.35)
  Top 0.305: U5.6 16.44,23.93 v16.18,23.67
  Top 0.813: J5.2 J2.2
  Bottom 0.305: v16.18,23.67 16.18,24.26 14.71,25.73 9.86,25.73 J2.2
N$37
  Top 0.813: S1.1 75.21,12.7 72.47,15.44 72.47,18.78 SV2.1
N$38
  Top 0.508: U$3.4 62.53,27.19 62.53,28.12 62.92,28.5 64.36,28.5 66.17,26.7 66.17,21.13 64.35,19.32 C2.1
N$39  (via drill 0.35)
  Top 0.508: U$3.3 62.69,24.75 62.69,23.37 63.98,22.07 v64.36,22.07 | v67,7.59 65.34,5.93 R1.1
  Bottom 0.508: v64.36,22.07 58.65,16.36 58.65,10.34 61.39,7.59 v67,7.59
N$40  (via drill 0.35)
  Top 0.305: U5.3 v14.05,26.92
  Top 0.813: J5.3 J2.3
  Bottom 0.305: v14.05,26.92 12.71,28.26 J2.3
N$41
  Top 0.305: U5.1 15.01,27.91 12.13,30.8 J2.4
  Top 0.813: J2.4 J5.4
N$42  (via drill 0.35)
  Top 0.305: U5.14 21.38,25.92 v22.91,24.38 | v24.74,26.04 0.01UF.1
  Bottom 0.305: v22.91,24.38 23.52,24.38 24.64,25.5 24.64,25.93 v24.74,26.04
N$43
  Top 0.254: U5.23 17.66,29.99 16.26,31.39 14.98,31.39 R5.1
N$44  (via drill 0.35)
  Top 0.305: R2.1 27,17.81 27,27.71 25.35,29.36 25.35,31.55 24.38,32.51 v20.75,32.51 | v15.7,29.87 16.92,28.64 U5.24
  Bottom 0.305: v20.75,32.51 18.11,29.87 v15.7,29.87
N$45
  Top 0.508: LED2.C R7.2
N$46  (via drill 0.35)
  Top 0.254: 16.43,25.93 U5.5 16.43,25.93 | 16.43,25.93 15.34,25.93 14.1,24.69 v14.1,23.34 | v10.9,19.56 11.72,18.73 R3.1
  Bottom 0.254: v14.1,23.34 10.9,20.14 v10.9,19.56
N$47
  Top 0.254: U5.2 16.43,27.41 14.81,27.41 14.4,27.81 13.39,27.81 12.22,26.64 12.22,23.11
  Top 0.305: 12.22,23.11 12.93,22.41 R4.1
N$48
  Top 0.305: U5.22 18.18,28.66 R9.1
N$49  (via drill 0.35)
  Top 0.305: U5.13 20.76,25.42 v21.51,24.66 | R8.1 23.19,29.77 v23.16,29.74 24.32,29.74 26.46,27.6 26.46,25.22 25.9,24.65 24.96,24.65 23.8,25.81 v23.8,26.44 23.9,26.54
  Bottom 0.305: 20.85,25.32 v21.51,24.66 23.29,26.44 v23.8,26.44
N$50
  Top 0.61: R11.2 65.94,14.61 66.47,15.14 68.24,15.14 LED3.C
N$51
  Top 0.813: LED4.C 64.38,16.48 R12.2
N$52
  Top 1.016: R30.1 27.71,68.2 31.88,64.03 31.88,61.95 30.46,60.54 U6.CH_PD
N$53
  Top 0.305: U4.19 U4.20 U4.21
N$54
  Top 0.254: U4.23 17.65,58.19 R17.1
N$55  (via drill 0.35)
  Top 0.508: LED6.C 35.61,17.18 v35.61,18.47 | v38.51,18.41 39.78,17.14 R25.2
  Bottom 0.508: v35.61,18.47 35.66,18.41 v38.51,18.41
N$56
  Top 0.61: R21.2 50.83,58.47 LED5.C
N$57
  Top 0.508: U7.11 34.07,22.98 LED6.A
N$65
  Top 0.254: U4.24 17.17,59.08 16.66,59.59 13.46,59.59 12.69,60.37 R10.1
N$66  (via drill 0.35)
  Top 0.305: U4.5 16.41,55.42 15.62,55.42 14.66,54.46 v14.66,53.52 | v11.38,52.93 12.09,52.23 R15.1
  Bottom 0.305: v14.66,53.52 14.07,52.93 v11.38,52.93
N$67
  Top 0.305: U4.2 11.69,56.95 10.59,55.85 10.59,54.89 10.87,54.61 R16.1
N$68
  Top 0.254: U4.14 20.4,55.46 0.01UF1.1
N$73
  Top 0.254: U4.22 18.16,59.56 19,60.4 19.94,60.4 20.5,60.96 R19.1
N$74
  Top 0.305: R18.1 21.89,54 20.95,54.94 U4.13
N$75  (via drill 0.35)
  Top 0.305: U5.10 v18.66,20.25 v18.67,20.24
  Bottom 0.305: J6.2 18.67,16.45 v18.67,20.24
N$76  (via drill 0.35)
  Top 0.305: U5.11 19.16,23.05 20.3,21.92 20.3,20.37 v20.32,20.34
  Bottom 0.305: 20.3,15.53 J6.1 19.68,17.75 20.32,18.39 v20.32,20.34
N$77  (via drill 0.35)
  Top 0.305: U4.10 18.66,53.01 19,52.68 19,51.89 v19.48,51.41
  Bottom 0.305: v19.48,51.41 19.48,47.74 J8.2
N$78  (via drill 0.35)
  Top 0.305: v19.76,52.68 19.16,53.28 U4.11
  Bottom 0.305: J8.1 20.17,45.88 20.17,51.79 19.76,52.2 v19.76,52.68
N$79
  Top 0.61: LED1.C R20.2
N$80
  Top 0.61: U6.GPIO4 49.28,58.54 LED5.A
N$82  (via drill 0.35)
  Top 0.508: U7.19 41.88,26.11 v43.05,27.28 | v47.8,33.32 46.46,31.98 v46.46,27.25
  Bottom 0.508: J13.1 37.41,37.2 37.41,33.55 38.68,32.28 40.31,32.28 41.35,33.32 v47.8,33.32 | v46.46,27.25 46.43,27.28 v43.05,27.28
N$84
  Top 0.813: R14.2 43.94,52.26 U6.GPIO15
N$85  (via drill 0.35)
  Top 0.508: U7.22 41.96,28.5 43.56,30.1 43.56,33.93 v42.16,35.33
  Bottom 0.508: v42.16,35.33 42.16,36.65 40.18,38.63 40.18,39.5 38.15,41.53 35.62,41.53 J13.2
N$86  (via drill 0.35)
  Top 0.406: U7.30 34.04,35.34 v34.65,35.94
  Bottom 0.406: v34.65,35.94 32.46,35.94 30.81,37.59 30.81,39.38 J12.1
N$87
  Top 0.406: U7.31 33.24,34.47 32.46,35.26 32.46,36.47 33.02,37.03 J12.2
PULSE  (via drill 0.35)
  Top 0.508: LED2.A 76.95,47.03 75.97,48.01 73.36,48.01 v73.15,48.21 | U$1.1 67.92,55.3 67.92,53.59 68.68,52.83 v71.02,52.83 69.93,51.74 69.93,41.22 68.22,39.52 v65.53,39.52 | U7.10 33.24,21.64 v32.21,20.6 | v39.8,21.69 41.83,21.69 v42.72,20.8
  Bottom 0.508: v73.15,48.21 73.15,50.7 v71.02,52.83 | v32.21,20.6 38.71,20.6 v39.8,21.69 | v42.72,20.8 42.72,22.33 44.53,24.13 56.9,24.13 65.61,32.84 65.61,39.45 v65.53,39.52
RST  (via drill 0.4)
  Top 0.61: U7.29 34.82,31.58 v34.82,29.52 | S4.P$2 v33.66,7.49
  Top 1.016: S4.P$2 28.88,4.35 R24.1
  Bottom 0.61: v34.82,29.52 41.27,23.06 41.27,19.46 | 41.27,19.46 J11.5 | v33.66,7.49 33.66,11.84 41.27,19.46
SCK  (via drill 0.4)
  Top 0.508: U7.17 41.59,24.5 v44.58,21.51
  Bottom 0.508: J11.3 43.32,7.3 44.58,8.56 v44.58,21.51
  Bottom 0.61: 41.34,7.24 J11.3
SCL  (via drill 0.35)
  Top 0.406: U7.28 35.64,33.52 v35.26,33.91
  Bottom 0.406: v35.26,33.91 32.41,33.91 29.21,37.11 29.21,40.87 28.4,41.68 25.49,41.68 JP2.2
SCLESP  (via drill 0.35)
  Top 0.813: U6.GPIO14 30.38,56.54 v33.5,53.42 | R22.2 43.16,45.72 42.27,44.83 v36.4,44.83 32.16,44.83 30.07,42.75 30.07,40.51 28.57,39.01 25.44,39.01 JP2.1
  Bottom 0.813: v33.5,53.42 36.4,50.52 v36.4,44.83
SDA
  Top 0.406: U7.27 36.44,36.16 39.32,39.04 43.48,39.04 JP3.2
SDAESP  (via drill 0.35)
  Top 0.508: v50.8,38.35 52.28,36.87 R23.2
  Top 0.813: U6.GPIO2 40.95,54.54 v39.01,52.6
  Bottom 0.508: JP3.1 47.56,41.59 v50.8,38.35
  Bottom 0.813: v39.01,52.6 39.01,43.1 40.54,41.58 43.48,41.58 JP3.1
STEP1  (via drill 0.35)
  Top 0.305: U4.8 17.66,52.72 v17.48,52.53
  Top 0.406: U7.1 29.51,30.11 v26.44,33.17
  Bottom 0.305: v17.48,52.53 17.48,51.36 15.32,49.2 v15.32,47.93 15.16,47.78
  Bottom 0.406: v26.44,33.17 21.51,33.17 13.84,40.84 13.84,46.46 15.16,47.78 v15.32,47.93
STEP2  (via drill 0.35)
  Top 0.254: v30.18,22.99 32.42,22.99 U7.9
  Top 0.305: U5.8 17.66,23.1 16.64,22.07 16.64,20.95 v16.18,20.5
  Bottom 0.254: v16.18,20.5 17.73,20.5 20.19,22.96 30.15,22.96 v30.18,22.99
VCC  (via drill 0.35, 0.4)
  Top 0.508: C24.1 69.04,76.91 v71.58,76.91 | v76.38,61.87 77.47,60.78 v77.47,56.62
  Top 0.61: C21.1 C22.1 C23.1 C24.1 | C5.1 59.05,13.99 v60.6,12.45
  Top 0.813: C5.1 58.1,14.8 57.4,15.49 57.4,17.4 56.36,18.44 51.08,18.44 50.49,17.86 50.49,15.42 U3.1
  Bottom 0.508: v71.58,76.91 70.21,75.54 70.21,64.8 73.13,61.87 v76.38,61.87 | v77.47,56.62 78.31,55.78 78.31,17.63 76.38,15.7 73.64,15.7 71.44,13.5 S1.2
  Bottom 0.61: v60.6,12.45 63.48,12.45 66.73,9.2 69.8,9.2 71.42,10.82 71.42,12.69 S1.2
VINT1  (via drill 0.35)
  Top 0.305: U4.12 20.07,54.22 v20.62,53.67 20.62,52.2 21.54,51.28 21.54,50.11 20.95,49.53 19.79,49.53 4.7UF1.2 | U4.17 21.03,56.95 v21.92,57.84
  Bottom 0.305: v21.92,57.84 21.92,54.97 v20.62,53.67
VINT2  (via drill 0.35)
  Top 0.305: 19.66,23.52 U5.12 | 19.66,23.52 20.17,23.01 21.29,23.01 21.82,22.48 21.82,19.2 21.31,18.69 20.33,18.69 4.7UF.2 | U5.17 20.4,27.41 21.11,27.41 21.36,27.66 21.36,28.83 20.52,29.67 v20.52,29.69 | v20.68,23.98 20.21,23.52 19.66,23.52
  Bottom 0.305: 20.64,29.58 v20.52,29.69 20.32,29.69 19.15,28.52 19.15,25.5 v20.68,23.98

## Text on the board
bPlace: #KarpeDiem